# Altium PCB PCB_OSHW_BiDi_SDI_Fiber_Converter_V3_2024-11-17.pcbdoc
Units mil, origin at the board's own origin, x right, y up, seen from the top; angles counter-clockwise.
Board outline 5278.01 x 2645 mil, 2 copper layers (Top Layer, Bottom Layer); 117 components, 63 nets, 272 pads, 111 vias.
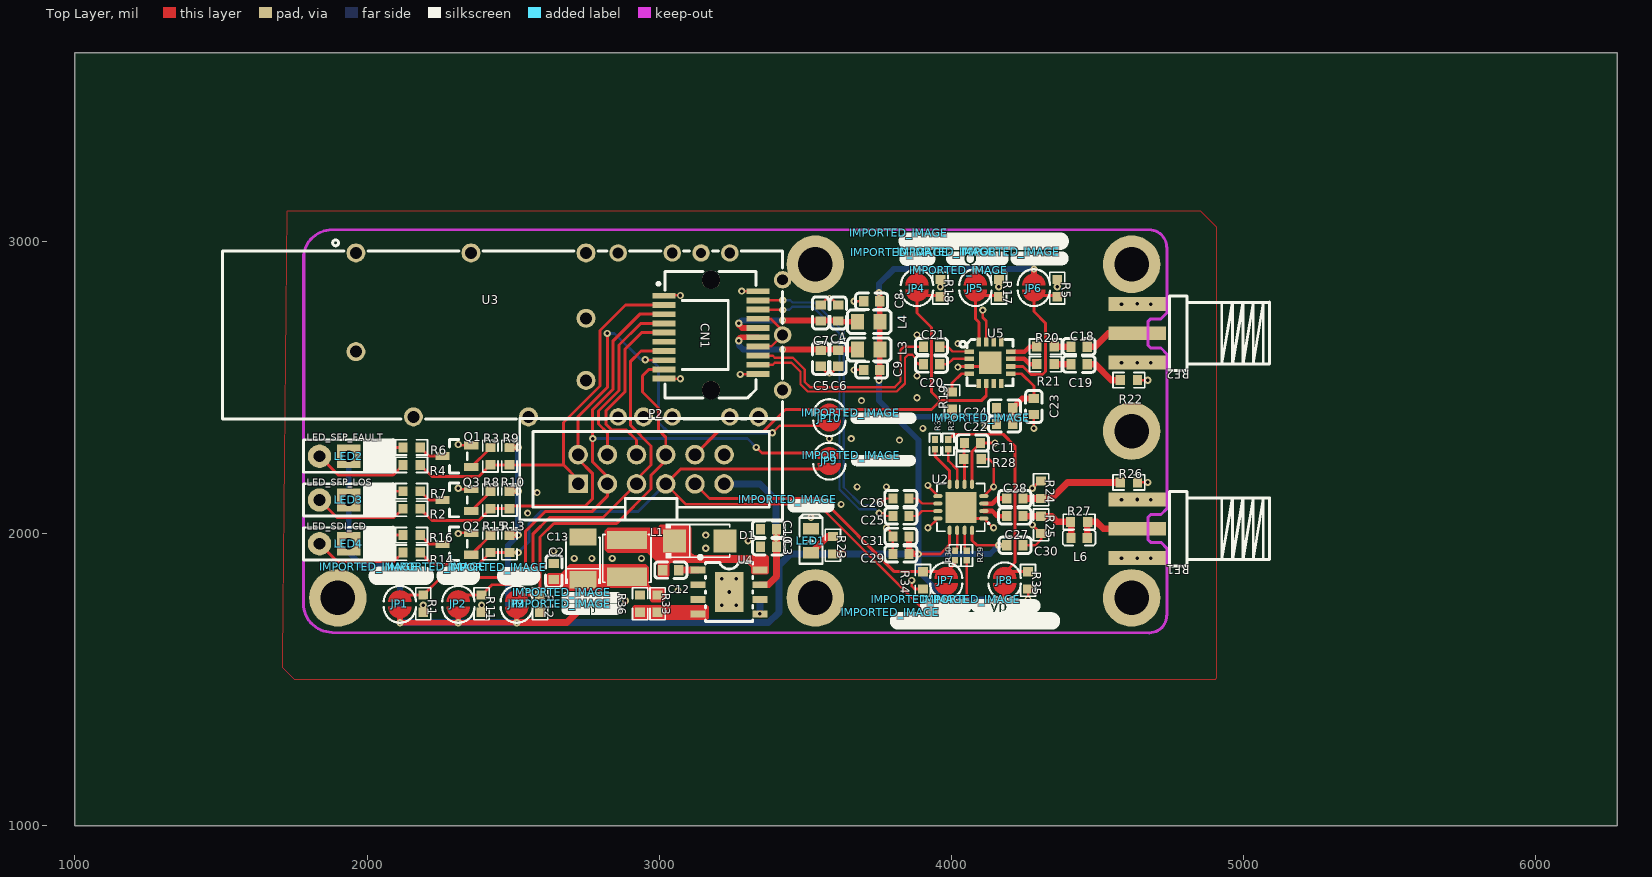
[diagram p0: Top Layer view]
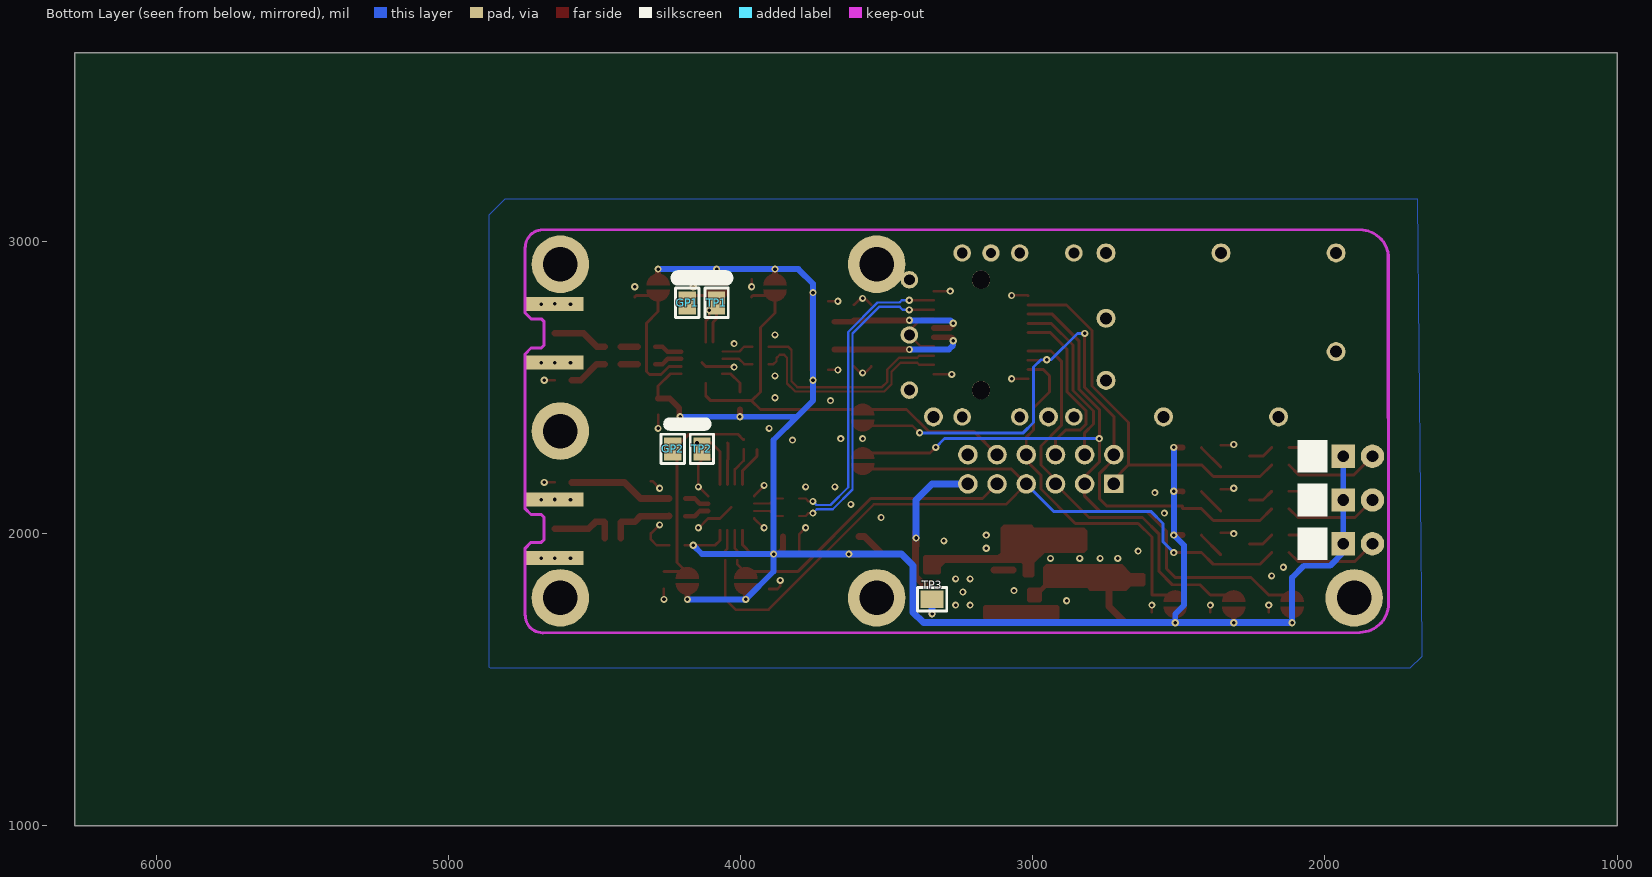
[diagram p1: Bottom Layer view, seen from below]

## Layer stack, top to bottom
Top Layer: signal copper (thickness not stored)
Dielectric: dielectric 12.6, FR-4, Dk 4.8
Bottom Layer: signal copper (thickness not stored)

## Board outline
6278.01,1000 1000,1000 1000,3645 6278.01,3645

## Components (designator, comment, footprint, x,y, rotation, side; value= is the part's Value field where it differs from the comment)
C2 "100n" C0603 2639.05,1870 r270 top
C3 "100n" C0603 3374.05,1955 r0 top
C4 "10u" C0603 3612.01,2755 r270 top
C5 "100n" C0603 3552.01,2600 r90 top
C6 "10u" C0603 3612.01,2600 r90 top
C7 "100n" C0603 3552.01,2755 r270 top
C8 "100n" C0603 3727.01,2795 r0 top
C9 "10u" C0603 3727.01,2560 r0 top
C10 "10u" C0603 3374.05,2015 r0 top
C11 "1u" C0603 4072.01,2310 r0 top
C12 "10n" C0603 3039.05,1875 r180 top
C13 "100uF" CASE-B_3528 2739.05,1915 r90 top
C18 "100n" C0603 4437.01,2640 r0 top
C19 "100n" C0603 4437.01,2580 r0 top
C20 "100n" C0603 3932.01,2580 r0 top
C21 "100n" C0603 3932.01,2640 r0 top
C22 "10u" C0603 4182.01,2375 r0 top
C23 "10n" C0603 4282.01,2435 r90 top
C24 "100n" C0603 4182.01,2430 r0 top
C25 "4.7u" C0603 3827.01,2060 r0 top
C26 "4.7u" C0603 3827.01,2120 r0 top
C27 "1u" C0603 4217.01,2060 r0 top
C28 "1u" C0603 4217.01,2120 r0 top
C29 "10n" C0603 3827.01,1930 r0 top
C30 "10n" C0603 4217.01,1960 r180 top
C31 "10u" C0603 3827.01,1990 r0 top
CN1 "HC-SFP-20P" CONN-SMD_20P-P0.80_HCTL_HC-SFP-20P 3177.01,2680 r270 top
D1 "SS34" SMA_L4.3-W2.6-LS5.2-RD 3139.05,1975 r0 top
GP1 "TEST-POINT-PTH-1X1" TESTPOINT-SMD_L1.6-W0.8_RCU-0C 4182.01,2790 r270 bottom
GP2 "TEST-POINT-PTH-1X1" TESTPOINT-SMD_L1.6-W0.8_RCU-0C 4232.01,2290 r270 bottom
IMPORTED_IMAGE "IMPORTED_IMAGE" IMPORTED_IMAGE 4025.46,2900.64 r0 top
IMPORTED_IMAGE "IMPORTED_IMAGE" IMPORTED_IMAGE 4100.28,2397.2 r0 top
IMPORTED_IMAGE "IMPORTED_IMAGE" IMPORTED_IMAGE 2005.73,1885.64 r0 top
IMPORTED_IMAGE "IMPORTED_IMAGE" IMPORTED_IMAGE 2238.23,1885.64 r0 top
IMPORTED_IMAGE "IMPORTED_IMAGE" IMPORTED_IMAGE 2445.09,1885 r0 top
IMPORTED_IMAGE "IMPORTED_IMAGE" IMPORTED_IMAGE 2665.73,1800 r0 top
IMPORTED_IMAGE "IMPORTED_IMAGE" IMPORTED_IMAGE 2665.73,1760 r0 top
IMPORTED_IMAGE "IMPORTED_IMAGE" IMPORTED_IMAGE 4202.91,2965 r0 top
IMPORTED_IMAGE "IMPORTED_IMAGE" IMPORTED_IMAGE 3981.97,2965 r0 top
IMPORTED_IMAGE "IMPORTED_IMAGE" IMPORTED_IMAGE 3822.89,2963.78 r0 top
IMPORTED_IMAGE "IMPORTED_IMAGE" IMPORTED_IMAGE 3819.77,3030 r0 top
IMPORTED_IMAGE "IMPORTED_IMAGE" IMPORTED_IMAGE 3789.77,1730 r0 top
IMPORTED_IMAGE "IMPORTED_IMAGE" IMPORTED_IMAGE 4067.33,1775 r0 top
IMPORTED_IMAGE "IMPORTED_IMAGE" IMPORTED_IMAGE 3893.22,1775 r0 top
IMPORTED_IMAGE "IMPORTED_IMAGE" IMPORTED_IMAGE 3654.81,2413.76 r0 top
IMPORTED_IMAGE "IMPORTED_IMAGE" IMPORTED_IMAGE 3656.51,2268.76 r0 top
IMPORTED_IMAGE "IMPORTED_IMAGE" IMPORTED_IMAGE 3438.83,2117.2 r0 top
JP1 "SOLDER BRIDGE" "SOLDER BRIDGE 2P BRIDGED" 2112.01,1760 r270 top
JP2 "SOLDER BRIDGE" "SOLDER BRIDGE 2P BRIDGED" 2312.01,1760 r270 top
JP3 "SOLDER BRIDGE" "SOLDER BRIDGE 2P BRIDGED" 2512.01,1760 r270 top
JP4 "SOLDER BRIDGE" "SOLDER BRIDGE 2P BRIDGED" 3882.01,2840 r90 top
JP5 "SOLDER BRIDGE" "SOLDER BRIDGE 2P BRIDGED" 4082.01,2840 r90 top
JP6 "SOLDER BRIDGE" "SOLDER BRIDGE 2P BRIDGED" 4282.01,2840 r90 top
JP7 "SOLDER BRIDGE" "SOLDER BRIDGE 2P BRIDGED" 3982.01,1840 r270 top
JP8 "SOLDER BRIDGE" "SOLDER BRIDGE 2P BRIDGED" 4182.01,1840 r270 top
JP9 "SOLDER BRIDGE" "SOLDER BRIDGE 2P BRIDGED" 3582.01,2250 r270 top
JP10 "SOLDER BRIDGE" "SOLDER BRIDGE 2P BRIDGED" 3582.01,2395 r90 top
L1 "10uH" IND-SMD_L4.0-W4.0 2889.05,1915 r270 top
L3 "100Ω" L0805 3717.01,2630 r180 top
L4 "100Ω" L0805 3717.01,2725 r180 top
L6 "2.7n" L0603 4437.01,1985 r0 top
LED1 "LED-0805_R" LED0805_RED 3519.05,1975 r90 top
LED2 "LED_SFP_FAULT" "LED RED/GREEN" 1837.01,2265 r0 top
LED3 "LED_SFP_LOS" "LED RED/GREEN" 1837.01,2115 r0 top
LED4 "LED_SDI_CD" "LED RED/GREEN" 1837.01,1965 r0 top
P2 "HDR-IDC-2.54-2X6P" IDC-TH_12P-P2.54_BOOMELE-2X6P-2.54MM 2972.01,2220 r0 top
Q1 "2N3904(SOT-23)" SOT-23-3_L2.9-W1.3-P1.90-LS2.4-TR 2307.01,2265 r0 top
Q2 "2N3904(SOT-23)" SOT-23-3_L2.9-W1.3-P1.90-LS2.4-TR 2307.01,1965 r0 top
Q3 "2N3904(SOT-23)" SOT-23-3_L2.9-W1.3-P1.90-LS2.4-TR 2307.01,2115 r0 top
R1 "10k" R0603 2192.01,1760 r270 top
R2 "300" R0603 2152.01,2085 r0 top
R3 "10k" R0603 2422.01,2265 r270 top
R4 "300" R0603 2152.01,2235 r0 top
R5 "10k" R0603 4362.01,2840 r90 top
R6 "300" R0603 2152.01,2295 r0 top
R7 "300" R0603 2152.01,2145 r0 top
R8 "10k" R0603 2422.01,2115 r270 top
R9 "10k" R0603 2487.01,2265 r90 top
R10 "10k" R0603 2487.01,2115 r90 top
R11 "10k" R0603 2392.01,1760 r270 top
R12 "10k" R0603 2592.01,1760 r270 top
R13 "10k" R0603 2487.01,1965 r90 top
R14 "300" R0603 2152.01,1935 r0 top
R15 "10k" R0603 2422.01,1965 r270 top
R16 "300" R0603 2152.01,1995 r0 top
R17 "10k" R0603 4162.01,2840 r90 top
R18 "10k" R0603 3962.01,2840 r90 top
R19 "750" R0603 4002.01,2455 r90 top
R20 "25" R0603 4322.01,2640 r0 top
R21 "25" R0603 4322.01,2580 r0 top
R22 "75" R0603 4607.01,2525 r0 top
R23 "10k" R0603 3594.05,1960 r90 top
R24 "75" R0603 4307.01,2150 r270 top
R25 "75" R0603 4307.01,2030 r90 top
R26 "75" R0603 4607.01,2175 r0 top
R27 "75" R0603 4437.01,2040 r0 top
R28 "DNF" R0603 4072.01,2255 r180 top
R29 "0" R0402 4052.01,1925 r90 top
R30 "0" R0402 4012.01,1925 r90 top
R31 "0" R0402 3944.05,2305 r270 top
R32 "0" R0402 3989.05,2305 r90 top
R33 "10k" R0603 2994.05,1760 r270 top
R34 "10k" R0603 3902.01,1840 r270 top
R35 "10k" R0603 4262.01,1840 r270 top
R36 "5.6k" R0603 2934.05,1760 r90 top
RF1 "SDI_IN" SMA-SMD_BWSMA-KE-P001 4636.34,2016.38 r180 top
RF2 "SDI_OUT" SMA-SMD_BWSMA-KE-P001 4636.34,2685.67 r180 top
TP1 "TEST-POINT-PTH-1X1" TESTPOINT-SMD_L1.6-W0.8_RCU-0C 4082.01,2790 r270 bottom
TP2 "TEST-POINT-PTH-1X1" TESTPOINT-SMD_L1.6-W0.8_RCU-0C 4132.01,2290 r270 bottom
TP3 "TEST-POINT-PTH-1X1" TESTPOINT-SMD_L1.6-W0.8_RCU-0C 3344.05,1775 r0 bottom
U2 "LMH0344SQ/NOPB" QFN-16_L4.0-W4.0-P0.65-BL-EP2.6 4032.01,2090 r90 top
U3 "HC-SFP-01L" TH_HC-SFP-01L 2692.01,2680 r0 top
U4 "TPS5430DDAR" ESOP-8_L4.9-W3.9-P1.27-LS6.0-TL-EP 3239.05,1800 r0 top
U5 "EQCO30T5" QFN16G-0.65-4X4MM 4132.01,2585 r0 top
? "" ? 5077.01,2183.7 r0 top
? "" ? 5174.12,2351.03 r0 top
? "" ? 5077.01,2520 r0 top

## Footprints (in the part's own frame and the unit in brackets; to place one, negate y for a bottom-side part, rotate by r counter-clockwise, add the part's x,y. Pads: shape width x height; smd on the part's side, far side on the other; paste and mask are expansions set on the pad)
C0603 [mm]
  rect 0.8x0.9 smd paste+0 mask+0.051: 1(-0.7,0) 2(0.7,0)
  silkscreen extent -1.41,-0.71 1.39,0.72
CASE-B_3528 [mil]
  rect 59.3x93.54 smd paste+0 mask+2: 1(-73.25,0) 2(73.25,0)
  silkscreen extent -87,-61 72,61
CONN-SMD_20P-P0.80_HCTL_HC-SFP-20P [mm]
  rect 0.5x2 smd paste+0 mask+0.051: 1(-3.4,-4.1) 2(-2.6,-4.1) 3(-1.8,-4.1) 4(-1,-4.1) 5(-0.2,-4.1) 6(0.6,-4.1) 7(1.4,-4.1) 8(2.2,-4.1) 9(3,-4.1) 10(3.8,-4.1) 11(3.4,4.1) 12(2.6,4.1) 13(1.8,4.1) 14(1,4.1) 15(0.2,4.1) 16(-0.6,4.1) 17(-1.4,4.1) 18(-2.2,4.1) 19(-3,4.1) 20(-3.8,4.1)
  round 1.6 hole 1.6 unplated paste+0: ""(-4.8,0) ""(4.8,0)
  silkscreen extent -5.5,-4.7 5.5,3.9
ESOP-8_L4.9-W3.9-P1.27-LS6.0-TL-EP [mm]
  rect 1.3x0.6 smd paste+0 mask+0.051: 1(-2.7,1.905) 2(-2.7,0.635) 3(-2.7,-0.635) 4(-2.7,-1.905) 5(2.7,-1.905) 6(2.7,-0.635) 7(2.7,0.635) 8(2.7,1.905)
  rect 2.5x3.5 smd paste+0 mask+0.051: 9(0,0)
  silkscreen extent -2.67,-2.55 2.05,3.2
IDC-TH_12P-P2.54_BOOMELE-2X6P-2.54MM [mm]
  rect 1.7x1.6 hole 1.1 paste+0 mask+0.051: 1(-6.35,-1.27)
  round 1.7 hole 1.1 paste+0 mask+0.051: 2(-6.35,1.27) 3(-3.81,-1.27) 4(-3.81,1.27) 5(-1.27,-1.27) 6(-1.27,1.27) 7(1.27,-1.27) 8(1.27,1.27) 9(3.81,-1.27) 10(3.81,1.27) 11(6.35,-1.27) 12(6.35,1.27)
  silkscreen extent -11.42,-4.4 11.42,4.4
IMPORTED_IMAGE [mil]
IND-SMD_L4.0-W4.0 [mm]
  rect 1.6x3.5 smd paste+0 mask+0.051: 1(-1.6,0) 2(1.6,0)
  silkscreen extent -2.08,-2.1 2.08,2.1
L0603 [mm]
  rect 0.8x0.864 smd paste-100 mask+0.051: 1(-0.7,0) 2(0.7,0)
  silkscreen extent -1.42,-0.65 1.41,0.67
L0805 [mil]
  rect 44.59x54.21 smd paste-3937.01 mask+2: 1(-38.05,0) 2(38.04,0)
  silkscreen extent -77,-40 73,40
LED0805_RED [mm]
  rect 1x1.4 smd paste+0 mask+0.051: 1(-1.05,0) 2(1.05,0)
  silkscreen extent -2,-1 2.3,1
"LED RED/GREEN" [mil]
  rect 80x80 hole 40 paste+0 mask+4: +(100,0)
  round 80 hole 40 paste+0 mask+4: G(0,0) R(200,0)
  silkscreen extent -55,-55 255,57
QFN16G-0.65-4X4MM [mil]
  rect 31.5x15.7 smd paste+0 mask+2: 1(-71,38) 2(-71,13) 3(-71,-13) 4(-71,-38) 9(71,-38) 10(71,-13) 11(71,13) 12(71,38)
  rect 15.7x31.5 smd paste+0 mask+2: 5(-38,-71) 6(-13,-71) 7(13,-71) 8(38,-71) 13(38,71) 14(13,71) 15(-13,71) 16(-38,71)
  rect 76.8x76.8 smd paste+0 mask+2: 17(0,0)
  silkscreen extent -103,-79 79,79
QFN-16_L4.0-W4.0-P0.65-BL-EP2.6 [mm]
  oval 0.35x0.8 smd paste-100 mask+0.051: 1(-0.975,-1.998) 2(-0.325,-1.998) 3(0.325,-1.998) 4(0.975,-1.998) 9(0.975,1.998) 10(0.325,1.998) 11(-0.325,1.998) 12(-0.975,1.998)
  oval 0.8x0.35 smd paste-100 mask+0.051: 5(1.998,-0.975) 6(1.998,-0.325) 7(1.998,0.325) 8(1.998,0.975) 13(-1.998,0.975) 14(-1.998,0.325) 15(-1.998,-0.325) 16(-1.998,-0.975)
  rect 2.7x2.7 smd paste-100 mask+0.051: 17(0,0)
  silkscreen extent -2.08,-2.49 2.08,2.08
R0402 [mm]
  rect 0.566x0.54 smd paste-100 mask+0.051: 1(-0.433,0) 2(0.433,0)
  silkscreen extent -0.94,-0.5 0.94,0.5
R0603 [mil]
  rect 31.75x34.02 smd paste-3937.01 mask+2: 1(-29.65,0) 2(29.65,0)
  silkscreen extent -55,-26 55,26
SMA-SMD_BWSMA-KE-P001 [mm]
  rect 5x1.2 smd paste+0 mask+0.051: 1(0,2.55) 2(0,-2.55) 5(0,0)
  rect 5x1.2 smd far side paste+0 mask+0.051: 3(0,-2.55) 4(0,2.55)
  silkscreen extent -11.5,-3.25 -2.79,3.25
SMA_L4.3-W2.6-LS5.2-RD [mm]
  rect 2x2 smd paste+0 mask+0.051: 1(-2.2,0) 2(2.2,0)
  silkscreen extent -2.98,-1.5 2.6,1.5
"SOLDER BRIDGE 2P BRIDGED" [mil]
  Top Layer region: -5.91,-39.37 -7.72,-39.33 -9.54,-39.2 -11.35,-38.99 -13.14,-38.7 -14.92,-38.32 -16.68,-37.87 -18.42,-37.33 -20.13,-36.71 -21.81,-36.01 -23.45,-35.24 -25.06,-34.39 -26.63,-33.47 -28.15,-32.48 -29.63,-31.42 -31.06,-30.29 -32.43,-29.09 -33.74,-27.84 -35,-26.52 -36.19,-25.15 -37.32,-23.73 -38.39,-22.25 -39.38,-20.73 -40.3,-19.16 -41.15,-17.55 -41.92,-15.9 -42.62,-14.22 -43.23,-12.51 -43.77,-10.77 -44.23,-9.01 -44.61,-7.23 -44.9,-5.44 -45.11,-3.63 -45.23,-1.82 -45.28,0 -45.23,1.82 -45.11,3.63 -44.9,5.44 -44.61,7.23 -44.23,9.01 -43.77,10.77 -43.23,12.51 -42.62,14.22 -41.92,15.9 -41.15,17.55 -40.3,19.16 -39.38,20.73 -38.39,22.25 -37.32,23.73 -36.19,25.15 -35,26.52 -33.74,27.84 -32.43,29.1 -31.06,30.29 -29.63,31.42 -28.15,32.48 -26.63,33.47 -25.06,34.39 -23.45,35.24 -21.81,36.01 -20.13,36.71 -18.42,37.33 -16.68,37.87 -14.92,38.32 -13.14,38.7 -11.35,38.99 -9.54,39.2 -7.72,39.33 -5.91,39.37
  Top Layer region: 9.84,-39.37 11.66,-39.33 13.48,-39.2 15.28,-38.99 17.08,-38.7 18.86,-38.32 20.62,-37.87 22.35,-37.33 24.07,-36.71 25.74,-36.01 27.39,-35.24 29,-34.39 30.57,-33.47 32.09,-32.48 33.57,-31.42 34.99,-30.29 36.37,-29.09 37.68,-27.84 38.94,-26.52 40.13,-25.15 41.26,-23.73 42.32,-22.25 43.32,-20.73 44.24,-19.16 45.09,-17.55 45.86,-15.9 46.55,-14.22 47.17,-12.51 47.71,-10.77 48.17,-9.01 48.54,-7.23 48.84,-5.44 49.05,-3.63 49.17,-1.82 49.21,0 49.17,1.82 49.05,3.63 48.84,5.44 48.54,7.23 48.17,9.01 47.71,10.77 47.17,12.51 46.55,14.22 45.86,15.9 45.09,17.55 44.24,19.16 43.32,20.73 42.32,22.25 41.26,23.73 40.13,25.15 38.94,26.52 37.68,27.84 36.37,29.1 34.99,30.29 33.57,31.42 32.09,32.48 30.57,33.47 29,34.39 27.39,35.24 25.74,36.01 24.07,36.71 22.35,37.33 20.62,37.87 18.86,38.32 17.08,38.7 15.28,38.99 13.48,39.2 11.66,39.33 9.84,39.37
  silkscreen extent -61,-55 65,55
SOT-23-3_L2.9-W1.3-P1.90-LS2.4-TR [mm]
  rect 1.25x0.7 smd paste+0 mask+0.051: 1(1.25,0.95) 2(1.25,-0.95) 3(-1.25,0)
  silkscreen extent -0.65,-1.46 0.9,1.46
TESTPOINT-SMD_L1.6-W0.8_RCU-0C [mm]
  rect 2x1.5 smd paste+0 mask+0.05: 1(0,0)
  silkscreen extent -1.27,-1.02 1.27,1.02
TH_HC-SFP-01L [mm]
  round 1.65 hole 1.05 paste+0 mask+0.05: 1(-18.55,7.125) 2(-8.55,7.125) 3(1.45,7.125) 11(16.45,-7.125) 14(6.45,-7.125) 16(-3.55,-7.125) 17(-13.55,-7.125) 18(-18.55,-1.455) 19(1.45,-3.955) 20(1.45,1.445)
  round 1.524 hole 0.95 paste+0 mask+0.05: 4(4.25,7.125) 5(8.95,7.125) 7(13.95,7.125) 8(18.55,4.795) 9(18.55,-0.005) 10(18.55,-4.805) 12(13.95,-7.125) 13(8.95,-7.125) 15(4.25,-7.125)
  round 1.524 hole 0.85 paste+0 mask+0.05: 6(11.45,7.125)
  Keep-Out Layer lines w0.254: -23.05,-7.239 -23.05,7.239
  silkscreen extent -30.15,-7.3 18.55,8.25
? [mil]

## Free pads (board coordinates)
  round 196.85 hole 118.11 paste+0 mask+2: 1(1899.94,1779.85) 1(3533.98,2921.89) 1(3533.98,1780.16) 1(4616.65,1780.16) 1(4616.65,2351.03) 1(4616.65,2921.89)

## Via types
v1: diameter 24.41, hole 12.2, Top Layer to Bottom Layer, tented both sides, 109 vias
v2: diameter 24, hole 12, Top Layer to Bottom Layer, tented both sides, 2 vias

## Nets (pads, with @x,y where several pads share a name; then routed paths per layer and width w, separated by ;. In a path a pad name is that pad's centre, name@x,y a point inside that pad or via, vN(x,y) a via of type N, cw(c..) or ccw(c..) an arc to the next point about the centre after c; other vN are vias at no path point)
+3.3V: C2.2 C8.2 C9.2 C13.1 C22.2 C23.2 C24.2 C29.2 C30.2 C31.2 L1.2 L3.1 L4.1 LED2.+ LED3.+ LED4.+ R9.2 R10.2 R13.2 R19.1 R23.1 R33.1 U2.13 U2.16 U5.9 | length 8166.7
  Top Layer w10: v1@2507.01,1994.66 2507.35,1995 v1(2517.01,1995) ; v1@2507.01,2144.66 2507.35,2145 v1(2517.01,2145) ; v1@2507.01,2294.66 2507.35,2295 v1(2517.01,2295) ; C29.2 v1(3887.01,1930) ; C29.2 3962.01,1930 3993.61,1961.6 U2.13 ; U2.16 4070.41,1976.6 4087.01,1960 v1(4162.01,1960) C30.2@4189.41,1960 ; U5.9 4240.01,2547 4282.01,2505 C23.2
  Top Layer w20.16: 2112.01,1730.47 v1(2112.01,1695) v1(2512.01,1695) 2512.01,1730.47 ; v1(2312.01,1695) 2312.01,1730.47 ; R13.2 v1(2517.01,1995) ; R10.2 v1(2517.01,2145) ; R9.2 v1(2517.01,2295) ; v1(3752.01,2525) 3752.01,2557.44 C9.2 C8.2 3754.57,2822.44 v1(3752.01,2825) ; C31.2 3854.57,1947.44 3872.01,1930 v1(3887.01,1930) ; 3882.01,2869.53 v1(3882.01,2905) ; v1(3982.01,1775) 3982.01,1810.47 ; v1(4002.01,2400) R19.1 ; 4082.01,2869.53 v1(4082.01,2905) ; v1(4182.01,1775) 4182.01,1810.47 ; C22.2 C24.2 4242.13,2462.56 C23.2 ; 4282.01,2869.53 v1(4282.01,2905)
  Top Layer w23.62: v1(2512.01,1695) 2684.05,1695 2739.05,1750 C13.1@2739.05,1841.75 ; R23.1 3594.39,1930 v1(3629.05,1930)
  Bottom Layer w20.16: LED2.+ LED4.+ 1937.01,1935 1982.01,1890 2072.01,1890 2112.01,1850 v1(2112.01,1695) ; v1(2512.01,1695) 2512.01,1725 2482.01,1755 2482.01,1960 v1(2517.01,1995) v1(2517.01,2145) v1(2517.01,2295) ; v1(4162.01,1960) 4132.01,1930 v1(3887.01,1930) ; v1(4182.01,1775) v1(3982.01,1775) 3887.01,1870 v1(3887.01,1930) ; v1(4207.01,2400) v1(4002.01,2400) 3807.01,2400 ; v1(4282.01,2905) v1(3882.01,2905) 3802.01,2905 3752.01,2855 v1(3752.01,2825) v1(3752.01,2525) 3752.01,2455 3807.01,2400 ; 3807.01,2400 3887.01,2320 v1(3887.01,1930)
  Bottom Layer w23.62: v1(2112.01,1695) 3374.01,1695 3409.01,1730 3409.01,1890 3449.01,1930 v1(3887.01,1930)
+5V: C3.2 C10.2 P2.11 U4.7 | length 581
  Top Layer w23.62: U4.7 3374.05,1825 3401.61,1852.56 C3.2 ; v1(3399.05,1985) 3399.05,1957.56 C3.2 ; C10.2@3401.61,2005 C3.2
  Bottom Layer w23.62: P2.11 3344.05,2170 3399.05,2115 v1(3399.05,1985)
GND: C2.1 C3.1 C4.1 C5.1 C6.1 C7.1 C8.1 C9.1 C10.1 C13.2 C22.1 C23.1 C24.1 C29.1 C30.1 C31.1 CN1.1 CN1.10 CN1.11 CN1.14 CN1.17 CN1.20 D1.2 GP1.1 GP2.1 LED1.2 P2.12 pad.1 Q1.1 Q2.1 Q3.1 R1.2 R5.2 R11.2 R12.2 R17.2 R18.2 R22.2 R24.1 R25.1 R26.2 R28.1 R31.1 R34.2 R35.2 R36.2 RF1.1 RF1.2 RF1.3 RF1.4 RF2.1 RF2.2 RF2.3 RF2.4 U2.1 U2.4 U2.9 U2.12 U2.17 U3.1 U3.2 U3.3 U3.4 U3.5 U3.6 U3.7 U3.8 U3.9 U3.10 U3.11 U3.12 U3.13 U3.14 U3.15 U3.16 U3.17 U3.18 U3.19 U3.20 U4.6 U4.9 U5.3 U5.17 | length 1946.8
  Top Layer w8.66: R1.2 v1(2192.01,1755) ; v1(2312.01,2000) 2314.41,2002.4 Q2.1 ; v1(2312.01,2155) 2314.61,2152.4 Q3.1 ; v1(2312.01,2305) 2314.61,2302.4 Q1.1 ; R11.2 v1(2392.01,1755) ; R12.2 v1(2592.01,1755) ; CN1.10 v1(3072.01,2530) ; CN1.1 3016.74,2815 v1(3072.01,2815) ; v1(3277.01,2545) 3337.29,2545 CN1.11 ; v1(3282.01,2830) CN1.20 ; CN1.14 3383.15,2640.63 U3.9 3422.32,2694.69 3381.89,2735.12 CN1.17 ; C5.1 3574.45,2550 v1(3582.01,2550) 3589.57,2550 C6.1 ; C7.1 3574.45,2805 v1(3582.01,2805) 3589.57,2805 C4.1 ; v1(3667.01,2560) C9.1 ; v1(3667.01,2795) C8.1 ; v1(3777.01,2020) 3799.45,1997.56 C31.1 C29.1 ; v1(3864.05,1840) 3864.05,1820 3873.72,1810.34 R34.2 ; v1(3919.05,2020) 3921.71,2020 U2.12 ; v1(3919.05,2165) 3919.05,2162.66 U2.9 ; v1(3962.01,2845) R18.2 ; U2.17 4070.4,2051.61 U2.1 4142.31,2020 v1(4144.05,2020) ; R28.1 4129.01,2255 4144.01,2240 v1@4144.01,2160 ; U2.4 4142.31,2160 v1(4144.05,2160) ; v1(4162.01,2845) R17.2 ; C30.1 4287.01,1960 4307.01,1980 R25.1 v1(4277.01,2030) ; v1(4262.01,1775) R35.2 ; v1(4277.01,2155) 4301.67,2179.66 R24.1 ; v1(4282.01,2360) C23.1 ; R26.2 v1(4672.01,2175) ; R22.2 v1(4672.01,2525)
  Top Layer w10: v1(4022.01,2570) 4024.01,2572 U5.3 4119.01,2572 U5.17
  other v1: 3214.05,1755 3264.05,1755 2884.05,1770 3239.05,1800 3064.05,1805 3214.05,1845 3264.05,1845 2182.01,1855 2142.01,1885 2709.05,1915 2769.05,1915 2839.05,1915 2939.05,1915 4582.01,1914.92 4682.01,1914.92 4636.34,1915.99 2639.05,1940 3159.05,1950 3304.05,1975 3159.05,1995 3519.05,2055 2549.05,2070 3622.01,2100 4582.01,2115.71 4682.01,2115.71 4636.34,2116.78 2582.01,2140 3677.01,2160 3777.01,2160 3822.01,2320 3582.01,2325 3657.01,2325 3902.01,2360 4115.43,2370.24 3692.01,2455 3882.01,2465 3882.01,2540 4582.01,2584.21 4682.01,2584.21 4636.34,2585.28 4022.01,2650 3882.01,2680 4582.01,2785 4682.01,2785 4636.34,2786.07 4362.01,2845
L6_2: L6.2 R27.2 RF1.5 | length 235.2
  Top Layer w22.84: L6.2 4464.57,2037.9 R27.2
  Top Layer w22.93: R27.2 4497.01,2040 4520.61,2016.4 RF1.5
LED1_1: LED1.1 R23.2 | length 98.2
  Top Layer w23.62: LED1.1 3575.06,1989.66 R23.2
LED2_G: LED2.G R4.1 | length 326.8
  Top Layer w10: LED2.G 1902.01,2200 2087.35,2200 R4.1
LED3_G: LED3.G R2.1 | length 322.6
  Top Layer w10: LED3.G 1897.01,2055 2092.35,2055 R2.1
LED3_R: LED3.R R7.1 | length 97.8
  Top Layer w10: LED3.R 2067.01,2145 R7.1
LFOUT: TP1.1 U5.15 | length 114
  Top Layer w10: v1(4107.01,2765) 4107.01,2740 4119.01,2728 U5.15
Q1_2: Q1.2 R3.1 | length 94.3
  Top Layer w10: Q1.2 2422.01,2293.4 R3.1
Q1_3: Q1.3 R6.2 | length 88.6
  Top Layer w10: R6.2 2211.67,2265 Q1.3
Q2_2: Q2.2 R15.1 | length 94.3
  Top Layer w10: Q2.2 2422.01,1993.4 R15.1
Q2_3: Q2.3 R16.2 | length 88.6
  Top Layer w10: R16.2 2211.67,1965 Q2.3
R6_1: LED2.R R6.1 | length 97.8
  Top Layer w10: LED2.R 2067.01,2295 R6.1
R7_2: Q3.3 R7.2 | length 88.6
  Top Layer w10: R7.2 2211.67,2115 Q3.3
R8_1: Q3.2 R8.1 | length 94.3
  Top Layer w10: Q3.2 2422.01,2143.4 R8.1
R14_1: LED4.G R14.1 | length 322.6
  Top Layer w10: LED4.G 1897.01,1905 2092.35,1905 R14.1
R16_1: LED4.R R16.1 | length 97.8
  Top Layer w10: LED4.R 2067.01,1995 R16.1
R19_2: R19.2 U5.4 | length 102.6
  Top Layer w10: R19.2 4002.01,2515 4034.01,2547 U5.4
SDI_IN_BYPASS: R32.2 R35.1 | length 782.6
  Top Layer w10: R32.2 3991.09,2322.04 4009.05,2340 4177.01,2340 4217.01,2300 4217.01,1900.6 4182.01,1865.6 4186.08,1869.66 R35.1
SDI_IN_CABLE_DETECT: P2.7 R13.1 R14.2 R15.2 R29.1 | length 2944.6
  Top Layer w8.66: P2.7 3092.01,2100 3544.01,2100 3904.01,1740 4017.01,1740 4052.01,1775 R29.1
  Top Layer w10: R14.2 2221.71,1895 2382.01,1895 R15.2 ; R15.2 R13.1 2487.35,1935 v1(2517.01,1935) ; P2.7 3072.51,2220.5 3582.01,2220.5
  Bottom Layer w10: v1(2517.01,1935) 2554.01,1972 2554.01,2035 2594.01,2075 2927.01,2075 P2.7
SDI_IN_MUTE: P2.9 R30.1 R34.1 | length 1040.9
  Top Layer w8.66: 3982.01,1865.59 4012.01,1895.59 R30.1
  Top Layer w10: P2.9 3172.01,2120 3554.01,2120 3804.31,1869.7 R34.1 ; R34.1 3977.94,1869.66 3982.01,1865.59
SDI_IN_N: C28.2 R24.2 R26.1 | length 355.4
  Top Layer w22.93: C28.2 R24.2 4342.31,2120.3 4397.01,2175 R26.1@4577.31,2175
SDI_IN_P: C27.2 L6.1 R25.2 R27.1 | length 226.7
  Top Layer w22.84: R27.1 4409.45,2037.9 L6.1
  Top Layer w22.93: C27.2 R25.2 4342.31,2059.7 4362.01,2040 R27.1@4407.31,2040
SDI_INA_N: C28.1 U2.3 | length 85.8
  Top Layer w15.75: U2.3 4139.81,2102.8 4157.01,2120 C28.1@4189.41,2120
SDI_INA_P: C27.1 U2.2 | length 85.8
  Top Layer w15.75: U2.2 4139.81,2077.2 4157.01,2060 C27.1@4189.41,2060
SDI_OUT_EN: P2.10 R18.1 U5.6 | length 1596.9
  Top Layer w10: P2.10 3202.01,2350 3357.01,2350 3432.01,2425 3932.01,2425 3962.01,2455 ; R18.1 3957.94,2814.41 3882.01,2814.41 3882.01,2755 3932.01,2705 3932.01,2485 3962.01,2455 ; U5.6 4119.01,2472 4102.01,2455 3962.01,2455
SDI_OUT_EQDIS: R17.1 U5.16 | length 245.1
  Top Layer w10: U5.16 4094.01,2723 4082.01,2735 4082.01,2814.4 4157.94,2814.41 R17.1
SDI_OUT_N: C19.2 R22.1 | length 135.5
  Top Layer w22.93: C19.2 4492.01,2580 4547.01,2525 R22.1@4577.31,2525
SDI_OUT_P: C18.2 RF2.5 | length 190.6
  Top Layer w22.93: C18.2 4492.01,2640 4537.71,2685.7 RF2.5
SDI_OUT_SD_HD: R5.1 U5.10 | length 492
  Top Layer w10: U5.10 4245.01,2572 4272.01,2545 4312.01,2545 4322.01,2555 4322.01,2720 4282.01,2760 4282.01,2814.4 4357.94,2814.41 R5.1
SDI_OUTA_N: R21.1 U5.11 | length 96.8
  Top Layer w15.75: U5.11 4249.01,2598 4267.01,2580 R21.1@4292.31,2580
SDI_OUTA_P: R20.1 U5.12 | length 96.3
  Top Layer w15.75: U5.12 4250.01,2623 4267.01,2640 R20.1@4292.31,2640
SDI_OUTB_N: C19.1 R21.2 | length 57.8
  Top Layer w22.93: R21.2 C19.1
SDI_OUTB_P: C18.1 R20.2 | length 57.8
  Top Layer w22.93: R20.2 C18.1
SFP_IN_N: C26.2 U2.10 | length 105.8
  Top Layer w8: C26.2 3882.01,2120 3899.21,2102.8 U2.10
SFP_IN_P: C25.2 U2.11 | length 105.8
  Top Layer w8: C25.2 3882.01,2060 3899.21,2077.2 U2.11
SFP_MOD_DEF0: CN1.6
SFP_OUT_N: C20.2 U5.2 | length 108.9
  Top Layer w8: C20.2 3987.01,2580 4005.01,2598 U5.2
SFP_OUT_P: C21.2 U5.1 | length 108.4
  Top Layer w8: C21.2 3987.01,2640 4004.01,2623 U5.1
SFP_RATE_SELECT0: CN1.7 P2.5 R11.1 | length 1467
  Top Layer w10: 2287.01,1785.59 2291.08,1789.66 R11.1 ; R11.1 2427.31,1825 2522.01,1825 2567.01,1870 2567.01,1998 2624.01,2055 2807.01,2055 P2.5 2922.01,2185 2972.01,2235 2972.01,2300 2902.01,2370 2902.01,2590 2936.91,2624.9 CN1.7
SFP_RATE_SELECT1: CN1.9 P2.8 R12.1 | length 1276.9
  Top Layer w10: 2487.01,1785.59 2491.08,1789.66 R12.1 ; R12.1 2592.01,1988 2639.01,2035 2854.01,2035 2972.01,2153 2972.01,2200 3022.01,2250 P2.8 3022.01,2330 2997.01,2355 2997.01,2430 2942.01,2485 2942.01,2540 2963.91,2561.9 CN1.9
SFP_RD+: C21.1 CN1.13 | length 756
  Top Layer w8: CN1.13 3387.81,2609.1 3394.91,2602 3457.81,2602 3498.11,2561.7 3498.11,2518.9 3515.71,2501.3 3805.51,2501.3 3825.71,2521.4 3825.71,2628.7 3837.01,2640 C21.1@3904.41,2640
SFP_RD-: C20.1 CN1.12 | length 758.2
  Top Layer w8: CN1.12 3387.81,2577.6 3394.81,2584.4 3452.71,2584.4 3483.01,2554.2 3483.01,2511.3 3508.21,2486.1 3813.01,2486.1 3840.81,2513.9 3840.81,2602 3850.81,2612.1 3866.01,2612.1 3877.01,2601.1 3877.01,2590 3887.01,2580 C20.1@3904.41,2580
SFP_RX_LOS: CN1.8 P2.2 R2.2 R8.2 R10.1 | length 2357.3
  Top Layer w7.87: v1(3387.01,2345) 3411.41,2369.4 3582.01,2369.4
  Top Layer w10: R2.2 2221.67,2045 2381.67,2045 R8.2 R10.1 ; R10.1 2487.01,2095 2747.01,2095 2772.01,2120 2772.01,2205 2722.01,2255 P2.2 2722.01,2400 2822.01,2500 v1(2822.01,2685) ; v1(2952.01,2595) 2953.62,2593.39 CN1.8
  Bottom Layer w10: v1(2822.01,2685) 2847.01,2685 2937.01,2595 v1(2952.01,2595) 2972.01,2595 2997.01,2570 2997.01,2380 3032.01,2345 v1(3387.01,2345)
SFP_SCL: CN1.5 P2.6 | length 617.3
  Top Layer w10: P2.6 2922.01,2320 2887.01,2355 2837.01,2355 2817.01,2375 2817.01,2420 2882.01,2485 2882.01,2630 2939.91,2687.9 CN1.5
SFP_SDA: CN1.4 P2.4 | length 600.8
  Top Layer w10: P2.4 2822.01,2345 2792.01,2375 2792.01,2420 2862.01,2490 2862.01,2645 2936.41,2719.4 CN1.4
SFP_TD+: C25.1 CN1.18 | length 1075.3
  Top Layer w8: CN1.18 3421.73,2766.62 v1(3422.52,2765.83) ; v2(3752.01,2070) 3767.01,2070 3777.01,2060 C25.1@3799.41,2060
  Bottom Layer w8: v1(3422.52,2765.83) 3445.21,2765.8 3455.31,2775.9 3525.81,2775.9 3616.51,2685.2 3616.51,2150.5 3684.01,2083 3739.01,2083 v2(3752.01,2070)
SFP_TD-: C26.1 CN1.19 | length 1071.8
  Top Layer w8: CN1.19 3422.05,2798.11 v1(3422.52,2798.58) ; v2(3752.01,2110) 3767.01,2110 3777.01,2120 C26.1@3799.41,2120
  Bottom Layer w8: v1(3422.52,2798.58) 3448.41,2798.6 3456.01,2791 3530.81,2791 3631.61,2690.2 3631.61,2158.6 3692.11,2098.1 3740.11,2098.1 v2(3752.01,2110)
SFP_TX_DISABLE: CN1.3 P2.3 R1.1 | length 2550.2
  Top Layer w10: 2112.01,1785.59 2116.08,1789.66 R1.1 ; R1.1 2252.31,1850 2512.01,1850 2542.01,1880 2542.01,2008 2609.01,2075 2769.01,2075 2822.01,2128 P2.3 2822.01,2195 2772.01,2245 v1(2772.01,2325) 2772.01,2425 2842.01,2495 2842.01,2660 2932.91,2750.9 CN1.3 ; v1(3332.01,2295) 3351.42,2275.59 3582.01,2275.59
  Bottom Layer w10: v1(2772.01,2325) 3302.01,2325 v1(3332.01,2295)
SFP_TX_FAULT: CN1.2 P2.1 R3.2 R4.2 R9.1 | length 1461.7
  Top Layer w10: R4.2 2221.67,2195 2381.67,2195 R3.2 R9.1 ; R9.1 2671.71,2235.3 P2.1@2722.01,2185 ; CN1.2 2884.41,2782.4 2797.01,2695 2797.01,2505 2672.01,2380 2672.01,2235 P2.1@2722.01,2185 ; P2.1@2722.01,2185 P2.1 P2.1@2722.01,2185
U2_5: C11.2 TP2.1 U2.5 | length 202.9
  Top Layer w10: U2.5 4070.4,2280.83 C11.2 v1(4149.05,2310)
U2_6: C11.1 R28.2 U2.6 | length 143.2
  Top Layer w10: C11.1 4042.35,2307.9 R28.2 4044.81,2252.54 U2.6
U2_7: R32.1 U2.7 | length 131.8
  Top Layer w8.66: R32.1@3989.01,2288 3989.01,2250 4019.21,2219.8 U2.7
U2_8: R31.2 U2.8 | length 139.8
  Top Layer w10: R31.2@3944.01,2288 3944.01,2265 3993.61,2215.4 U2.8
U2_14: R30.2 U2.14 | length 72.3
  Top Layer w8.66: R30.2 4019.22,1949.25 U2.14
U2_15: R29.2 U2.15 | length 72.3
  Top Layer w8.66: U2.15 4044.81,1949.24 R29.2
U4_1: C12.1 U4.1 | length 66.2
  Top Layer w23.62: C12.1 U4.1
U4_4: R33.2 R36.1 U4.4
U4_5: TP3.1 U4.5 | length 51.3
  Top Layer w23.62: v1(3344.05,1725) U4.5@3345.35,1725
  Bottom Layer w23.62: v1(3344.05,1725) TP3.1
U4_8: C12.2 D1.1 L1.1 U4.8
VCC_SFPR: C5.2 C6.2 CN1.15 L3.2 | length 506
  Top Layer w20.16: v1(3272.01,2660) 3272.01,2665 3279.14,2672.13 CN1.15 ; v1(3422.01,2630) 3612.01,2630 C6.2 3614.45,2630 L3.2
  Bottom Layer w20.16: v1(3272.01,2660) 3272.01,2645 3287.01,2630 v1(3422.01,2630)
VCC_SFPT: C4.2 C7.2 CN1.16 L4.2 | length 490.8
  Top Layer w20.16: v1(3272.01,2720) 3272.01,2715 3283.39,2703.62 CN1.16 ; v1(3422.01,2730) 3612.01,2730 C4.2 3614.45,2725 L4.2
  Bottom Layer w20.16: v1(3272.01,2720) 3282.01,2730 v1(3422.01,2730)
pads on no net: CN1. U4.2 U4.3 U5.5 U5.7 U5.8 U5.13 U5.14

## Polygon pours and split planes (outlines as drawn)
GND on Bottom Layer (solid): 1682.01,3145 4807.01,3145 4862.01,3090 4862.01,1545 4857.01,1540 1707.01,1540 1667.01,1580 1667.01,1615
GND on Top Layer (solid): 1727.01,3105 4852.01,3105 4907.01,3050 4907.01,1505 4902.01,1500 1752.01,1500 1712.01,1540 1712.01,1575

## Keep-outs
Keep-Out Layer:
  lines w10: 1782.01,1760.47 ccw(c1880.44,1760.47) 1880.44,1662.05 ; 1782.01,2941.57 cw(c1880.44,2941.57) 1880.44,3040 ; 4677.01,3040 cw(c4677.01,2980.95) 4736.07,2980.95 ; 4677.48,1660.47 ccw(c4677.48,1719.53) 4736.54,1719.53

## Other copper
Top Layer:
  region net +3.3V: 2884.05,1895 2954.05,1895 2964.05,1885 2964.05,1825 2974.05,1815 3014.05,1815 3019.05,1810 3019.05,1770 3014.05,1765 2974.05,1765 2969.05,1770 2969.05,1800 2954.05,1815 2814.05,1815 2804.05,1805 2679.05,1805 2664.05,1820 2619.05,1820 2614.05,1825 2614.05,1860 2619.05,1865 2664.05,1865 2694.05,1895
  region net U4_4: 2914.05,1755 2909.05,1750 2909.05,1710 2914.05,1705 3164.05,1705 3169.05,1710 3169.05,1750 3164.05,1755
  region net U4_8: 2824.05,2020 2994.05,2020 3004.05,2030 3099.05,2030 3109.05,2020 3109.05,1935 3119.05,1925 3369.05,1925 3374.05,1920 3374.05,1865 3369.05,1860 3319.05,1860 3314.05,1865 3314.05,1885 3299.05,1900 3039.05,1900 3034.05,1895 3034.05,1855 3029.05,1850 2999.05,1850 2994.05,1855 2994.05,1900 2959.05,1935 2824.05,1935 2814.05,1945 2814.05,2010

## Text inside footprints (layer, text, board x,y; h text height)
LED2: Document "G" at 1509.58,2245.12 h39.37 r270; Document "+" at 1625.34,2264.04 h39.37 r225; Document "R" at 1734.58,2250.12 h39.37 r270
LED3: Document "+" at 1625.34,2086.2 h39.37 r315; Document "G" at 1509.58,2095.12 h39.37 r270; Document "R" at 1734.58,2100.12 h39.37 r270
LED4: Document "+" at 1628.09,1941.08 h39.37 r315; Document "R" at 1737.33,1955 h39.37 r270; Document "G" at 1512.33,1950 h39.37 r270